# Altium PCB molecule.PcbDoc
Units mil, origin at the board's own origin, x right, y up, seen from the top; angles counter-clockwise.
Board outline 1510 x 1500 mil, 2 copper layers (Top Layer, Bottom Layer); 23 components, 32 nets, 118 pads, 0 vias.
Unrouted connection lines stored in the file: 55.
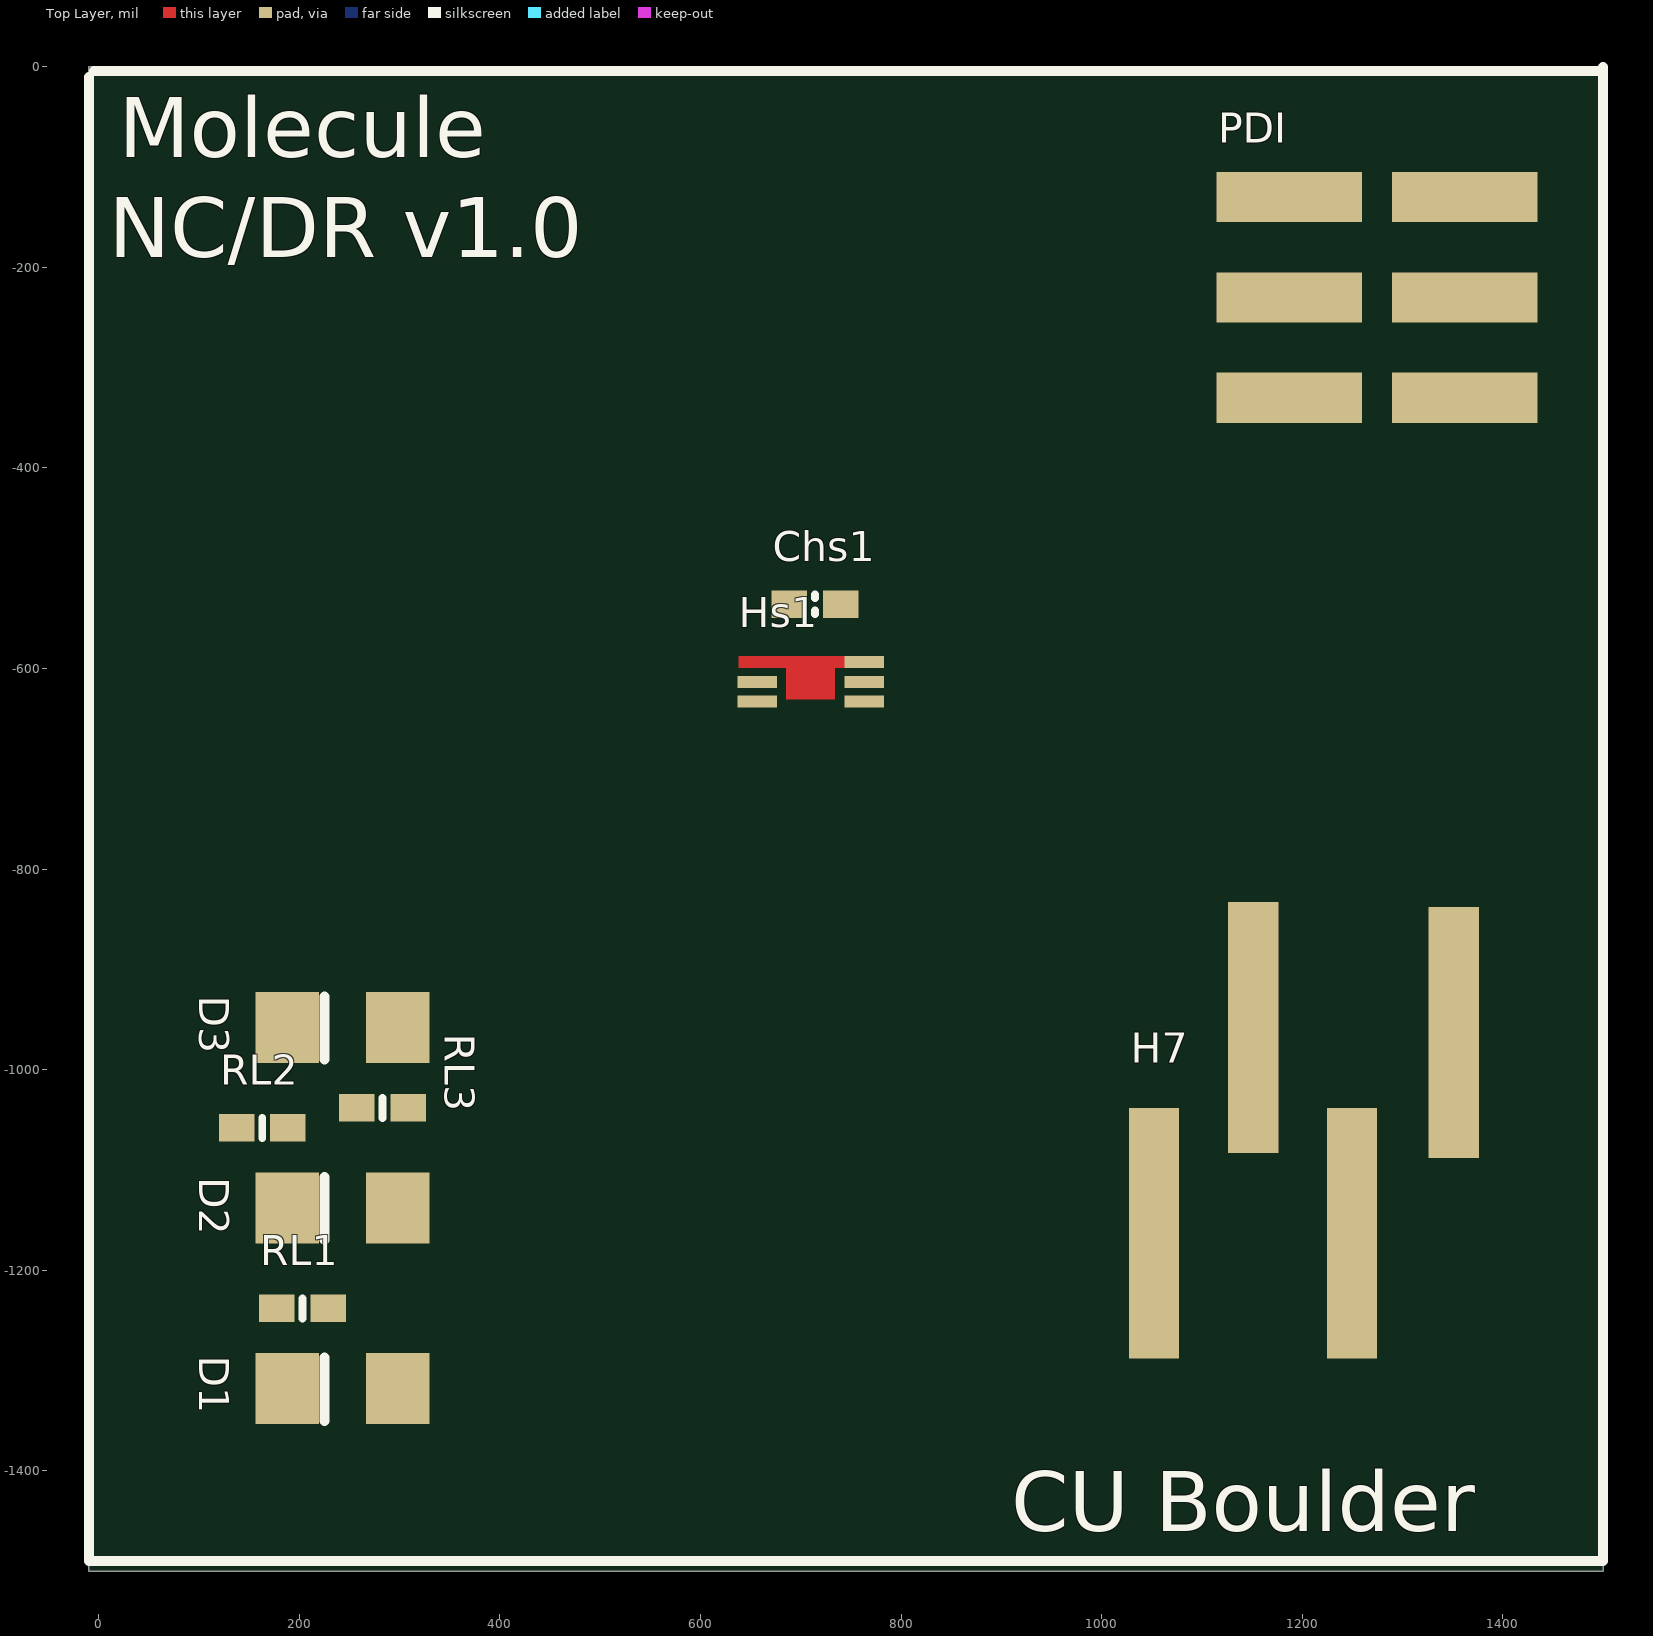
[diagram p0: Top Layer view]
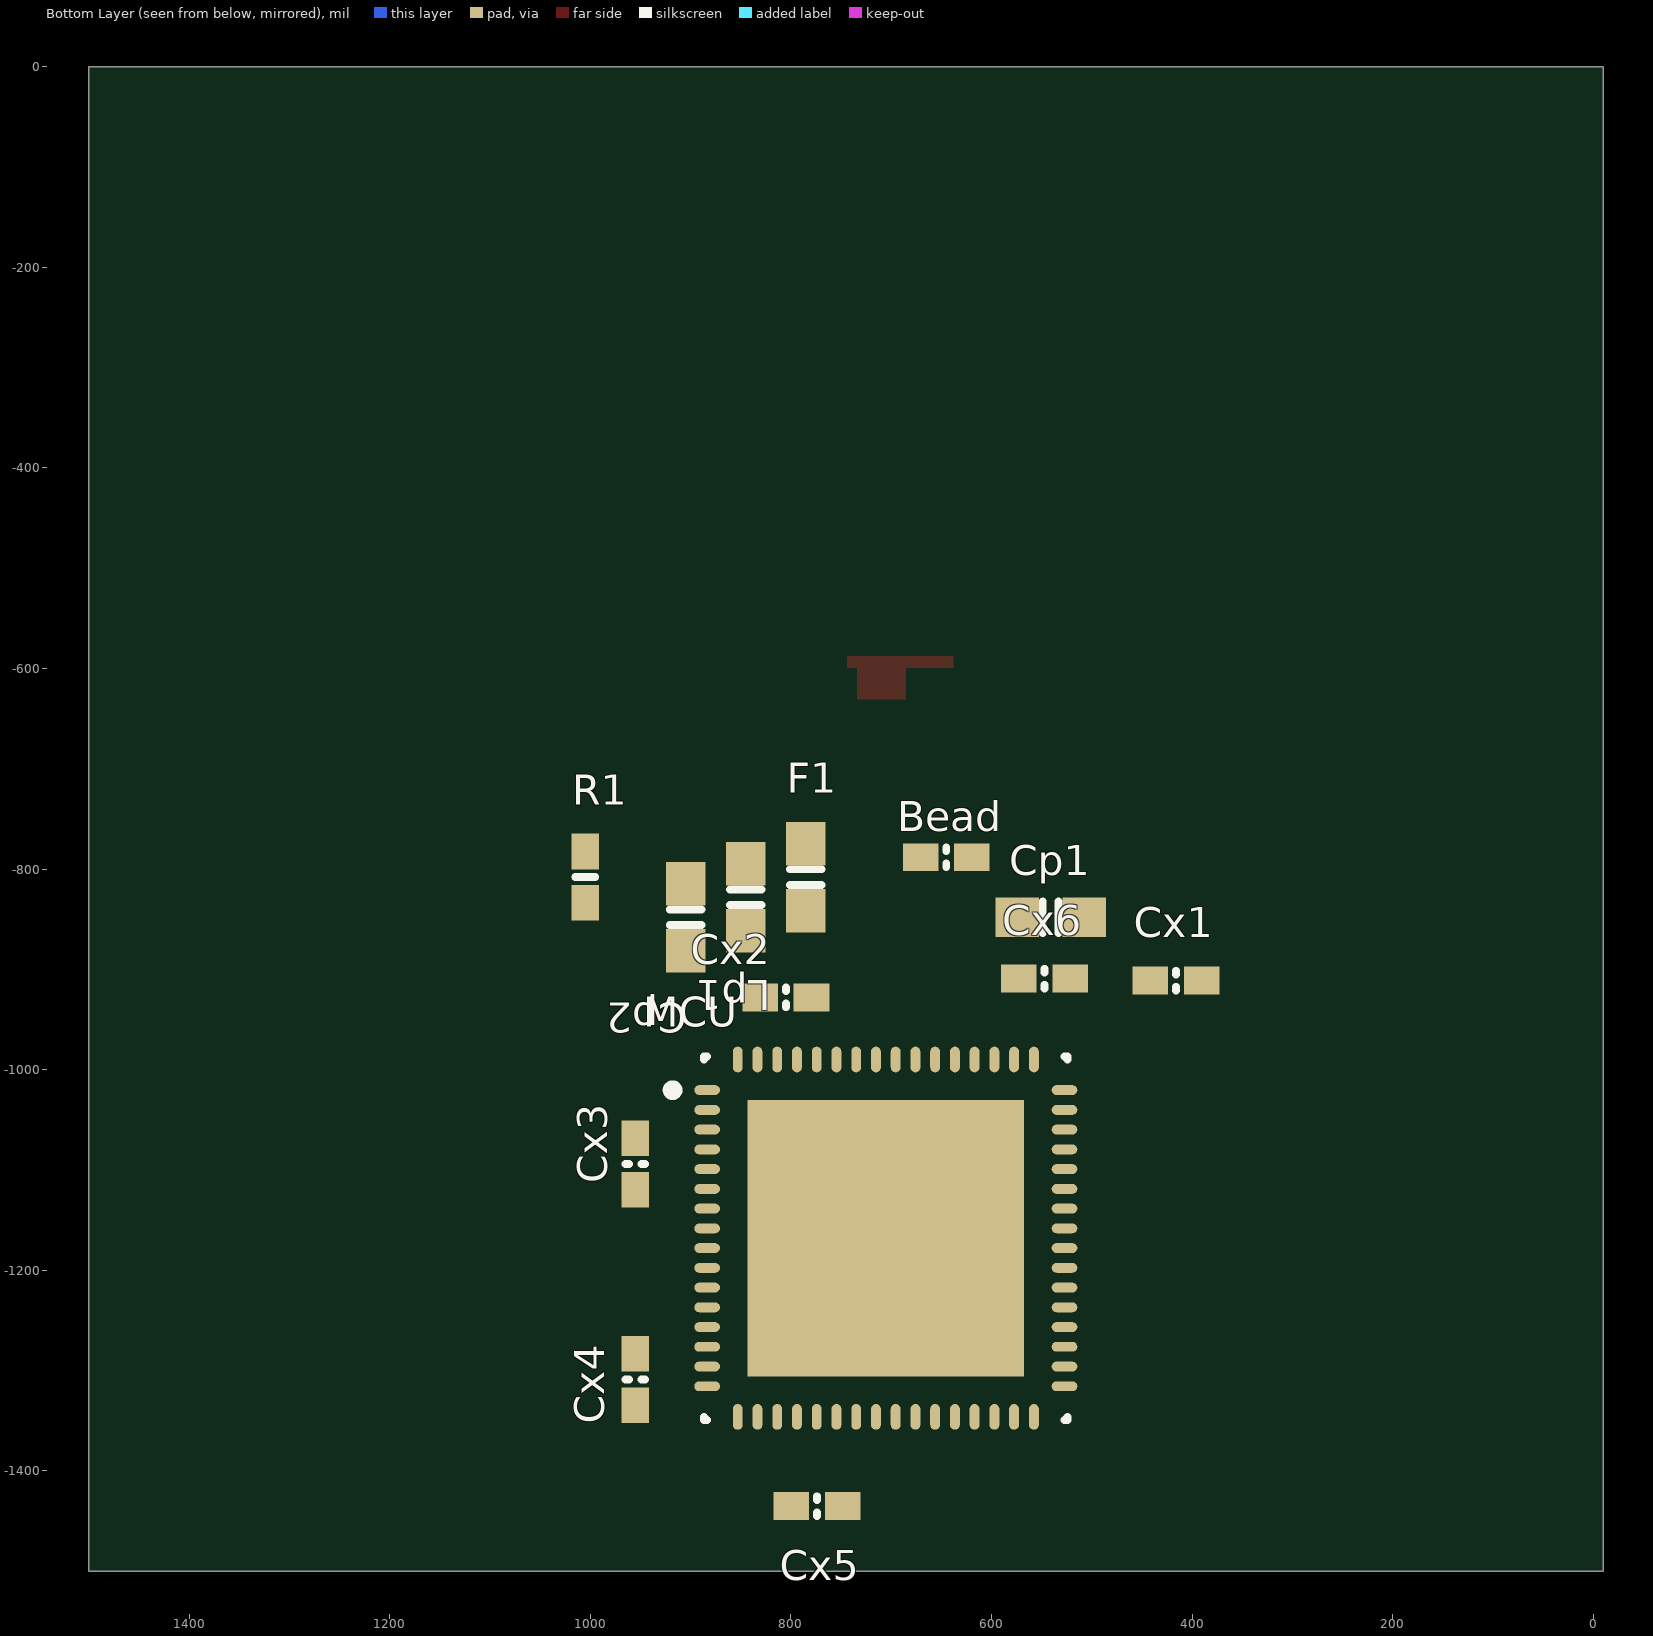
[diagram p1: Bottom Layer view, seen from below]

## Layer stack, top to bottom
Top Layer: signal copper 1.4
Dielectric: dielectric 12.6, FR-4, Dk 4.8
Bottom Layer: signal copper 1.4

## Board outline
0,0 1500,0 1500,-1500 -10,-1500 -10,0

## Design rules (kind name [scope] priority, off if disabled: settings)
Clearance [All] p1: gap=6
MinimumSolderMaskSliver [All] p1: minsoldermaskwidth=1.8
PolygonConnect [All] p1: connectstyle=Relief reliefconductorwidth=10 reliefentries=4 polygonreliefangle="90 Angle"
RoutingVias [All] p1: holewidth=15 width=45 viastyle="Through Hole" minholewidth=15 minwidth=45 maxholewidth=15 maxwidth=45
SilkscreenOverComponentPads [All] p1: minsilkscreentomaskgap=10
SolderMaskExpansion [All] p1: expansion=4
Width [All] p1: maxlimit=350 minlimit=6 preferedwidth=6
26 further rules are at their usual default settings.

## Components (designator, comment, footprint, x,y, rotation, side; value= is the part's Value field where it differs from the comment)
Bead "" C0402-DRL 645,-788 r180 bottom
Chs1 "" C0402-DRL 714,-536 r180 top
Cp1 "" C0603-DRL 541,-848 r0 bottom
Cp2 "" C0603-DRL 905,-848 r270 bottom
Cx1 "" C0402-DRL 416,-911 r180 bottom
Cx2 "" C0402-DRL 805,-928 r0 bottom
Cx3 "" C0402-DRL 955,-1094 r270 bottom
Cx4 "" C0402-DRL 955,-1309 r270 bottom
Cx5 "" C0402-DRL 774,-1435 r180 bottom
Cx6 "" C0402-DRL 547,-909 r180 bottom
D1 "LEDSMD" D1206-DRL 243,-1318 r0 top
D2 "LEDSMD" D1206-DRL 243,-1138 r0 top
D3 "LEDSMD" D1206-DRL 243,-958 r0 top
F1 "FSMF" C0603-DRL 785,-808 r90 bottom
H7 "DF3A-4P" UART 1051,-1163 r90 top
Hs1 "Hall" HALL 763,-633 r90 top
Lp1 "" C0603-DRL 845,-828 r270 bottom
MCU "ATMEL_XMEGA128A3" QFN50P900X900X100-64N 705.32,-1168 r180 bottom
PDI "PDI" PDI_SMT 1187,-130 r0 top
R1 "R" R0402-DRL 1005,-808 r90 bottom
RL1 "R" R0402-DRL 203,-1238 r0 top
RL2 "R" R0402-DRL 163,-1058 r0 top
RL3 "R" R0402-DRL 283,-1038 r0 top

## Footprints (in the part's own frame and the unit in brackets; to place one, negate y for a bottom-side part, rotate by r counter-clockwise, add the part's x,y. Pads: shape width x height; smd on the part's side, far side on the other; paste and mask are expansions set on the pad)
C0402-DRL [mm] "Chip Capacitor; Body 1.0 x 0.5 mm (LxW typ)"
  rect 0.9x0.7 smd: 1(-0.65,0) 2(0.65,0)
  silkscreen extent 0,-0.25 0,0.25
C0603-DRL [mm] "Chip Capacitor; Body 1.6 x 0.8 mm (LxW typ)"
  rect 1.1x1 smd: 1(-0.85,0) 2(0.85,0)
  silkscreen extent -0.2,-0.4 0.2,0.4
D1206-DRL [mm] "Diode ; Body 3.2 x 1.6 mm (LxW typ)"
  rect 1.6x1.8 smd: 1(-1.4,0) 2(1.4,0)
  silkscreen extent -0.46,-0.81 -0.46,0.79
HALL [mm] "Hall Effect sensor"
  rect 0.3x1 smd: 1(0,0) 2(0.5,0) 3(1,0) 5(0.5,2.7) 6(0,2.7)
  Top Layer region: 0.05,0.731 1,0.731 1,1.981 0.05,1.981
  Top Layer region: 0.85,0.483 1.15,0.483 1.15,3.175 0.85,3.175
PDI_SMT [mm] "WM17457-ND"
  rect 3.68x1.27 smd: 1(0,0) 2(0,-2.54) 3(0,-5.08) 4(4.445,-5.08) 5(4.445,-2.54) 6(4.445,0)
QFN50P900X900X100-64N [mm] "QFN, 64-Leads, Body 9.1x9.1mm (max), Pitch 0.50mm, IPC Medium Density"
  oval 0.65x0.25 smd: 1(-4.525,3.75) 2(-4.525,3.25) 3(-4.525,2.75) 4(-4.525,2.25) 5(-4.525,1.75) 6(-4.525,1.25) 7(-4.525,0.75) 8(-4.525,0.25) 9(-4.525,-0.25) 10(-4.525,-0.75) 11(-4.525,-1.25) 12(-4.525,-1.75) 13(-4.525,-2.25) 14(-4.525,-2.75) 15(-4.525,-3.25) 16(-4.525,-3.75) 33(4.525,-3.75) 34(4.525,-3.25) 35(4.525,-2.75) 36(4.525,-2.25) 37(4.525,-1.75) 38(4.525,-1.25) 39(4.525,-0.75) 40(4.525,-0.25) 41(4.525,0.25) 42(4.525,0.75) 43(4.525,1.25) 44(4.525,1.75) 45(4.525,2.25) 46(4.525,2.75) 47(4.525,3.25) 48(4.525,3.75)
  oval 0.25x0.65 smd: 17(-3.75,-4.525) 18(-3.25,-4.525) 19(-2.75,-4.525) 20(-2.25,-4.525) 21(-1.75,-4.525) 22(-1.25,-4.525) 23(-0.75,-4.525) 24(-0.25,-4.525) 25(0.25,-4.525) 26(0.75,-4.525) 27(1.25,-4.525) 28(1.75,-4.525) 29(2.25,-4.525) 30(2.75,-4.525) 31(3.25,-4.525) 32(3.75,-4.525) 49(3.75,4.525) 50(3.25,4.525) 51(2.75,4.525) 52(2.25,4.525) 53(1.75,4.525) 54(1.25,4.525) 55(0.75,4.525) 56(0.25,4.525) 57(-0.25,4.525) 58(-0.75,4.525) 59(-1.25,4.525) 60(-1.75,4.525) 61(-2.25,4.525) 62(-2.75,4.525) 63(-3.25,4.525) 64(-3.75,4.525)
  rect 7x7 smd: 65(0,0)
  silkscreen extent -5.53,-4.6 4.6,4.6, body extent -4.55,-4.55 4.55,4.55, height 1
R0402-DRL [mm] "resistor"
  rect 0.9x0.7 smd: 1(-0.65,0) 2(0.65,0)
  silkscreen extent 0,-0.25 0,0.25
UART [mil] "S1013E-36-ND"
  rect 250x50 smd: 1(0,-1.26) 2(205,-100) 3(0,-198.43) 4(200,-300)

## Part data
Bead Lp1: library part Inductor, "Inductor"
Chs1 Cx1 Cx2 Cx3 Cx4 Cx5 Cx6: library part Cap, "Capacitor"
Cp1 Cp2: library part Cap2, "Capacitor"
D1 D2 D3: "LED"
F1: "Fuse PTC Reset"
H7: "4pin header"
Hs1: "620-11-ND Hall Effect"
MCU: library part ATMEL_XMEGA128
R1 RL1 RL2 RL3: "Resistor"

## Nets (pads, with @x,y where several pads share a name; then routed paths per layer and width w, separated by ;. In a path a pad name is that pad's centre, name@x,y a point inside that pad or via, vN(x,y) a via of type N, cw(c..) or ccw(c..) an arc to the next point about the centre after c; other vN are vias at no path point)
ADCB0: MCU.10
ADCB1: Hs1.2 MCU.11
AVCC: Bead.1 Cp1.1 Cx6.2 Hs1.6 MCU.61
CLK: MCU.57 PDI.6 R1.1
D0: MCU.6 RL1.1
D1: MCU.7 RL2.1
D2: MCU.9 RL3.1
DAC0: MCU.8
DATA: MCU.56 PDI.4
GND: Chs1.1 Cp1.2 Cp2.2 Cx1.1 Cx2.1 Cx3.1 Cx4.1 Cx5.1 Cx6.1 D1.1 D2.1 D3.1 H7.1 Hs1.3 MCU.14 MCU.24 MCU.34 MCU.44 MCU.52 MCU.60 PDI.1
NetD1_2: D1.2 RL1.2
NetD2_2: D2.2 RL2.2
NetD3_2: D3.2 RL3.2
RXD0: MCU.18
RXD1: MCU.22
RXD2: MCU.28
RXD3: MCU.32
RXD4: MCU.38
RXD5: MCU.42
RXD6: H7.4 MCU.48
SCL: MCU.17
SDA: MCU.16
TXD0: MCU.19
TXD1: MCU.23
TXD2: MCU.29
TXD3: MCU.33
TXD4: MCU.39
TXD5: MCU.43
TXD6: H7.3 MCU.49
VCC: Bead.2 Chs1.2 Cp2.1 Cx1.2 Cx2.2 Cx3.2 Cx4.2 Cx5.2 Hs1.1 Hs1.5 Lp1.1 MCU.15 MCU.25 MCU.35 MCU.45 MCU.53 PDI.3 R1.2
VIN: F1.1 H7.2
VINPROT: F1.2 Lp1.2
pads on no net: MCU.1 MCU.2 MCU.3 MCU.4 MCU.5 MCU.12 MCU.13 MCU.20 MCU.21 MCU.26 MCU.27 MCU.30 MCU.31 MCU.36 MCU.37 MCU.40 MCU.41 MCU.46 MCU.47 MCU.50 MCU.51 MCU.54 MCU.55 MCU.58 MCU.59 MCU.62 MCU.63 MCU.64 MCU.65 PDI.2 PDI.5

## Silkscreen, mask and mechanical layers (free items; w line width, h text height)
Top Overlay:
  lines w10: -10,-10 -10,-1490 1500,-1490 1500,0 ; -5,-4 1500,-4
  text "Molecule" at 20,-90 h60
  text "NC/DR v1.0" at 10,-190 h60
  text "CU Boulder" at 910,-1460 h60